# Altium PCB NODE_Module.PcbDoc (part 3 of 3)
Units mil, origin at the board's own origin, x right, y up, seen from the top; angles counter-clockwise.
Board outline 4300 x 3800 mil, 4 copper layers (Top Layer, Int1 (GND), Int2 (GND), Bottom Layer), stack 43.712 mil thick; 95 components, 106 nets, 420 pads, 98 vias.
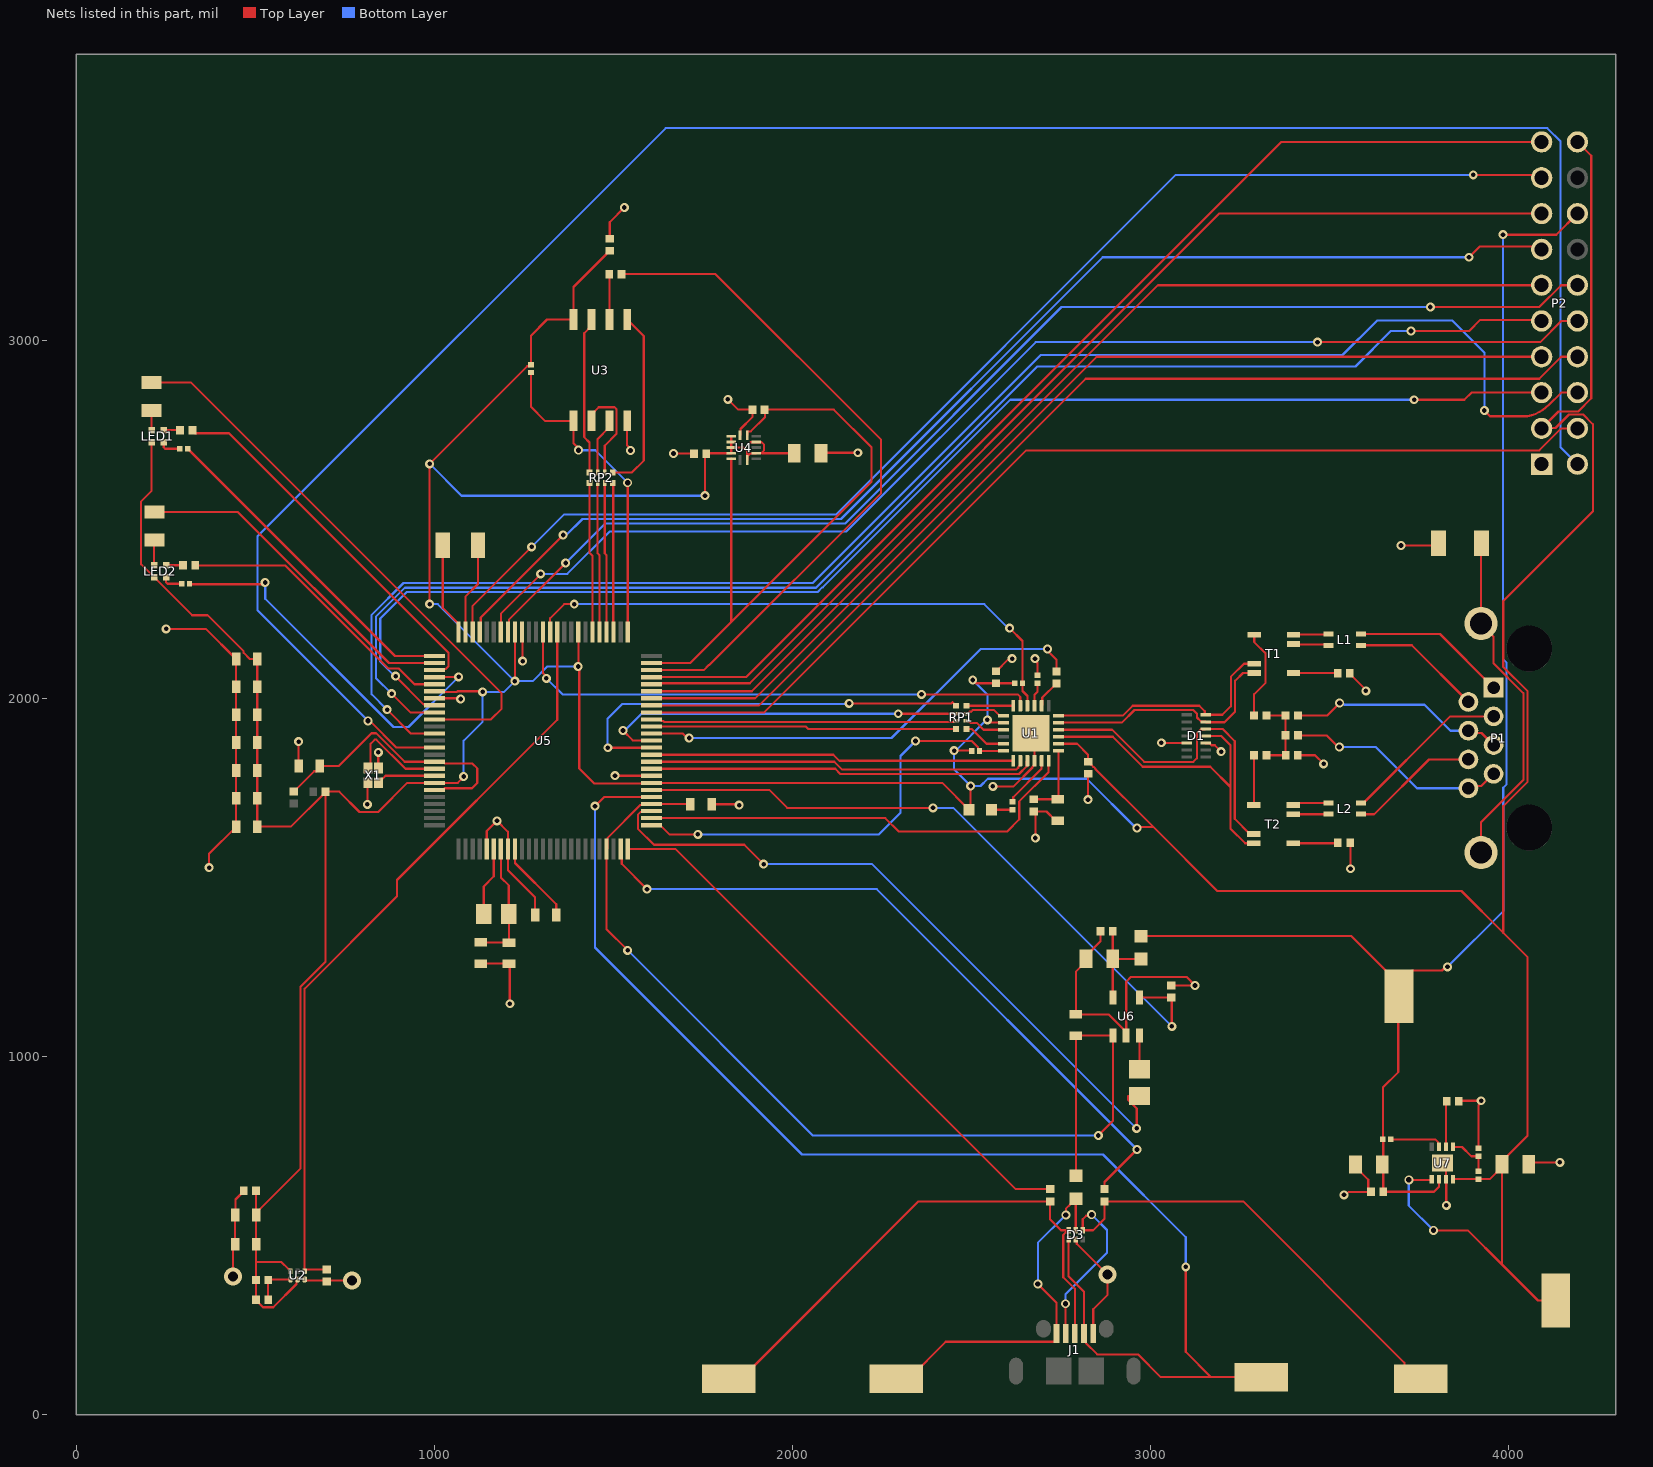
[diagram p4: the nets of this part, all layers, seen from the top]

## Via types
v1: diameter 25, hole 13, Top Layer to Bottom Layer, 83 vias
v2: diameter 25, hole 15, Top Layer to Bottom Layer, 12 vias
v3: diameter 50, hole 28, Top Layer to Bottom Layer, 3 vias

## Nets (pads, with @x,y where several pads share a name; then routed paths per layer and width w, separated by ;. In a path a pad name is that pad's centre, name@x,y a point inside that pad or via, vN(x,y) a via of type N, cw(c..) or ccw(c..) an arc to the next point about the centre after c; other vN are vias at no path point)
3V3: C1.2 C4.2 C9.2 C10.2 C11.2 C12.2 C13.2 C14.2 C17.2 C18.2 C19.1 C20.1 C21.1 C22.1 C23.1 C33.2 D2.1 FB1.1 FB2.1 FB3.2 LED1.1 LED2.1 P2.2 P2.20 R2.1 R3.2 R11.2 R19.2 TP6.1 U1.2 U1.14 U2.2 U2.6 U3.8 U4.2 U4.4 U4.8 U4.9 U4.10 U4.11 U4.14 U5.8 U5.17 U5.31 U5.44 U5.82 U7.1 U7.4 | length 16166.7
  Top Layer w6: LED1.1@210.54,2716.54 210.54,2580.4 181.31,2551.18 181.31,2375.6 LED2.1@217.54,2339.38 323.9,2233.01 366.97,2233.01 467.48,2132.5 467.48,2128.49 484.91,2111.06 C17.2@505.72,2111.06 C18.2@505.72,2033.17 C19.1@505.72,1955.29 C20.1@505.72,1877.4 C21.1@505.72,1799.52 C22.1@505.72,1721.64 C23.1@505.72,1642.64 599.57,1642.64 FB3.2@696.04,1739.1 ; C11.2@502,563.91 C9.2@502,625.99 ; U2.6@598.6,400.83 598.6,402.97 595.5,406.07 593.36,406.07 573.02,426.41 502.53,426.41 ; U2.2@618.28,378 615.21,374.93 615.21,365.03 550.37,300.19 521.62,300.19 501.99,319.82 FB2.1@501.99,321 FB1.1@501.99,376.29 502.53,376.82 502.53,426.41 ; v1(987,2264) v1(987,2656.06) 1259.48,2928.54 1265.52,2928.54 R11.2@1270,2933.02 1270,3014 1315,3059 U3.8@1389,3059 1389,3149.98 1481.19,3242.17 1481.19,3243.35 1488.82,3250.98 C12.2@1490,3250.98 ; U5.31@1000.85,2020.8 1002.65,2019 1062.83,2019 1064.62,2020.8 1133.2,2020.8 v1(1135,2019) ; v1(1082,1782.5) 1082,1781 1065.89,1764.89 U5.44@1000.85,1764.89 924.9,1764.89 843.51,1683.5 791.18,1683.5 734.4,1740.29 FB3.2@696.04,1740.29 FB3.2@696.04,1739.1 ; v1(1225,2049) 1225.26,2049.26 U5.17@1225.26,2186.15 ; U5.8@1402.43,2186.15 1402.43,2090.43 v1(1402,2090) 1405,2087 1405,1805 1447,1763 1605.26,1763 U5.82@1607.15,1764.89 2418.68,1764.89 D2.1@2493.57,1690 2498,1694.43 v1(2498,1756) ; v1(1756,2567) 1756,2680.84 C14.2@1759.54,2684.38 1760.92,2685.76 U4.11@1829.32,2685.76 U4.10@1829.32,2701.5 ; U4.8@1829.32,2733 U4.9@1829.32,2717.25 U4.10@1829.32,2701.5 ; U4.14@1874,2666.66 U4.14@1874,2676.11 ; 1884.02,2716.31 U4.4@1898.06,2716.31 ; U4.2@1899,2685.76 1898.06,2684.82 1882.71,2684.82 U4.14@1874,2676.11 ; U4.2@1899,2686.69 1914.24,2686.69 1921.39,2693.84 1921.39,2709.17 1914.24,2716.31 U4.4@1898.06,2716.31 ; U4.4@1899,2717.25 U4.4@1898.06,2716.31 ; 1916.11,2685.76 2004.76,2685.76 C13.2@2005.13,2685.38 ; v1(2452,1855) 2499.95,1855 R2.1@2500.95,1854 ; v1(2504,2052) 2513.01,2042.99 C1.2@2569,2042.99 R3.2@2621,2043 ; v1(2545,1941) 2552.99,1933.01 U1.14@2589.93,1933.01 ; U1.2@2743.47,1873.96 2795.68,1873.96 2826,1843.64 C4.2@2826,1824.01 2827.18,1824.01 2834.81,1816.38 2834.81,1815.2 2840.39,1809.62 2841.54,1809.62 2846.81,1804.35 2846.81,1803.2 3008,1642 ; v1(2963,1639) 2966,1642 3008,1642 ; v2(3722,656) 3784.47,656 U7.1@3786.47,658 ; v2(3791,515) 3887.04,515 3982.47,419.57 ; U7.4@3845.53,658 R19.2@3916.47,658 3947.94,658 3982.07,692.13 C33.2@3982.07,700 3982.07,707.87 4054,779.8 4054,1278 3985.67,1346.33 ; C33.2@3982.47,692.13 3982.47,419.57 ; P2.2@4093,2755 P2.2@4093.95,2755.95 ; TP6.1@4132,319 4083.04,319 3982.47,419.57 ; P2.20@4193,3555 4231.69,3516.31 4231.69,2838.98 4194.8,2802.09 4140.09,2802.09 P2.2@4093.95,2755.95 ; 502.53,426.41 C10.2@502.53,476 C11.2@502.53,558 502.53,563.91 625.97,687.34 625.97,1194.94 696.04,1265.01 FB3.2@696.04,1739.1 ; U4.10@1829.32,2701.5 1863.83,2701.5 1874,2691.33 U4.14@1874,2676.11 ; 3008,1642 3186.97,1463.03 3868.97,1463.03 3985.67,1346.33 ; 3985.67,1346.33 3985.67,1699.7 4054,1768.03 4054,2020.41 3985.67,2088.74 3985.67,2272.67 4236,2523 4236,2766.71 4209.02,2793.69 4169.42,2793.69 4131.69,2755.95 P2.2@4093.95,2755.95
  Bottom Layer w6: v1(987,2264) 1010,2264 v1(1225,2049) ; v1(987,2656.06) 1076.06,2567 v1(1756,2567) ; v1(1082,1782.5) 1082,1882.8 1135,1935.8 v1(1135,2019) 1195,2019 v1(1225,2049) ; v1(1402,2090) 1315.59,2090 1274.59,2049 v1(1225,2049) ; v1(2504,2052) 2545,2011 v1(2545,1941) 2542.5,1941 2456.5,1855 v1(2452,1855) 2452,1802 v1(2498,1756) 2525.77,1756 2546.27,1776.5 2822.5,1776.5 2960,1639 v1(2963,1639) ; v2(3722,656) 3722,584 v2(3791,515)
5V: C31.2 C32.2 FB5.1 P2.18 R20.1 TP5.1 U7.2 | length 4068.9
  Top Layer w6: FB5.1@2974,1337.05 3561.27,1337.05 3692.43,1205.89 TP5.1@3692.43,1201.8 ; C32.2@3647.87,699.07 3650.48,696.46 C31.2@3650.48,623.48 ; C32.2@3648.37,699.57 3650.47,701.67 R20.1@3650.47,767.95 ; C31.2@3650.48,622.48 C31.2@3650.48,623.48 ; TP5.1@3692.43,1169 3692.43,957.04 3649.43,914.04 R20.1@3649.43,769 ; TP5.1@3694.47,1169 3694.47,1199.75 TP5.1@3692.43,1201.8 ; U7.2@3806.16,658 3806.16,637 3792.14,622.98 3650.98,622.98 C31.2@3650.48,623.48 ; v1(3830,1251) 3824.86,1251 3814.66,1240.8 3731.43,1240.8 3694.47,1203.84 TP5.1@3692.43,1201.8 ; v1(3985,3296) 4134,3296 P2.18@4193,3355 ; R20.1@3649.43,769 R20.1@3650.47,767.95 ; R20.1@3649.43,769 R20.1@3650.47,767.95
  Bottom Layer w6: v1(3830,1251) 3985.67,1406.67 3985.67,1751.34 3995.17,1760.83 3995.17,2100.35 3985,2110.52 v1(3985,3296)
EFM_BUS: C15.2 C30.2 FB4.2 U5.72 U5.79 U6.1 | length 2930.7
  Top Layer w6: v1(1540,1297) 1481.17,1355.83 U5.72@1481.17,1579.85 1484.07,1582.76 1484.07,1611.23 1575.77,1702.93 1604.24,1702.93 U5.79@1607.15,1705.83 1714.64,1705.83 C15.2@1715.47,1705 ; FB4.2@2792.39,667.49 2792.39,1058.61 C30.2@2792,1059 2895.15,1059 U6.1@2895.29,1059.14 2895.29,820.29 v1(2855,780)
  Bottom Layer w6: v1(1540,1297) 2057,780 v1(2855,780)
GND: C1.1 C2.1 C3.1 C4.1 C5.1 C6.1 C7.1 C8.1 C9.1 C10.1 C11.1 C12.1 C13.1 C14.1 C15.1 C16.1 C17.1 C18.1 C19.2 C20.2 C21.2 C22.2 C23.2 C24.1 C25.2 C26.2 C28.2 C29.1 C30.1 C31.1 C32.1 C33.1 C34.1 D1.5 D1.10 D3.2 J1.5 P2.1 R4.1 R10.1 R13.1 R17.2 R21.1 U1.22 U1.25 U2.3 U3.4 U4.7 U5.16 U5.32 U5.55 U5.58 U5.83 U6.2 U7.3 U7.9 X1.2 X1.4 | length 5619
  Top Layer w6: v1(251,2195) 361.89,2195 446.25,2110.64 C17.1@446.67,2111.06 C18.1@446.67,2033.17 C19.2@446.67,1955.29 C20.2@446.67,1877.4 C21.2@446.67,1799.52 C22.2@446.67,1721.64 C23.2@446.67,1642.64 371,1566.97 v1(371,1528) ; v3(438,386) 438,470.53 C10.1@443.47,476 C11.1@443.47,558 445,559.53 445,601 460.35,616.35 460.35,618.36 C9.1@467.98,625.99 ; C24.1@620.94,1812 620,1812.94 621,1813.94 v1(621,1880) ; U2.3@637.97,378 641.03,374.94 696.94,374.94 697,375 v3(770,375) ; v1(813,1705) 813,1763.53 X1.2@814.47,1765 ; v1(843.7,1849.95) 843.7,1806.63 X1.4@844,1806.34 ; U5.32@1000.85,2001.11 U5.32@1000.85,2001.11 1071.77,2001.06 v1(1073.53,1999.3) ; C26.2@1129.81,1260.11 C25.2@1208.17,1260.11 ; U5.55@1146.52,1579.85 1146.52,1630.52 v1(1175,1659) 1205.57,1628.43 U5.58@1205.57,1579.85 1205.57,1521.42 1281.47,1445.52 C16.1@1281.47,1396 ; C25.2@1208.69,1259.58 C25.2@1208.17,1260.11 ; v1(1211,1148) 1211,1257.27 C25.2@1208.17,1260.11 ; U5.16@1244.94,2186.15 1245.97,2185.12 1245.97,2106.03 v1(1247,2105) ; C12.1@1490,3285 1490,3331 v1(1531,3372) ; v1(1505,1785) 1505.21,1784.79 1606.94,1784.79 U5.83@1607.15,1784.57 ; U3.4@1539,2776 1538,2775 1538,2708.55 1548.2,2698.34 v1(1548.2,2693.2) ; v1(1668,2685) 1724.91,2685 C14.1@1725.53,2684.38 ; C15.1@1774.53,1705 1849,1705 v1(1851.5,1702.5) ; v1(1820,2836) 1848.62,2807.38 R13.1@1888.41,2807.38 1888.41,2786.57 1855.25,2753.41 1855.25,2737.28 U4.7@1854.31,2736.35 ; C13.1@2079.93,2685.38 2081.55,2687 v1(2183,2687) ; v1(2560,1755) 2618.19,1755 2670.98,1807.79 2670.98,1810.32 2676.55,1815.89 U1.22@2676.55,1826.71 2676.55,1893.64 U1.25@2666.7,1903.49 ; C1.1@2569,2077.01 2570.18,2077.01 2601.54,2108.36 2610.36,2108.36 v1(2614,2112) ; v1(2678,2112) 2678,2106.86 2685,2099.86 R4.1@2685,2065.02 ; v1(2679,1611) 2679,1680.99 C3.1@2675,1684.99 2710.16,1684.99 2735.68,1659.47 C2.1@2741.58,1659.47 ; D3.2@2791.59,489.39 2794.59,486.39 2794.59,477.41 v3(2880,392) 2880,334 2840.46,294.46 J1.5@2840.46,227.24 ; v1(2826,1718) C4.1@2826,1789.99 ; C29.1@2860.99,1350 2860.99,1322.08 2820.2,1281.29 C28.2@2820.2,1273.42 2820.2,1265.54 2792,1237.34 C30.1@2792,1118.06 2883.72,1118.06 U6.2@2932.69,1069.09 ; U6.2@2932.69,1059.14 U6.2@2932.69,1069.09 ; v1(3031,1877) 3031.34,1876.66 3101.28,1876.66 D1.5@3101.62,1876.32 ; R17.2@3058,1199.13 3058.13,1199 v1(3125,1199) 3101,1223 2946,1223 2932.69,1209.69 U6.2@2932.69,1069.09 ; D1.10@3154.38,1876.32 3155.71,1874.98 3165.94,1874.98 3170.97,1869.96 3180.04,1869.96 v1(3198,1852) ; C8.1@3412.01,1842 3460,1842 v1(3484,1818) ; v1(3541,614) 3546.14,614 3554.63,622.48 C31.1@3616.46,622.48 3616.46,623.48 3608.83,631.11 3608.83,656.43 3573.07,692.19 C32.1@3573.07,699.07 ; C6.1@3557.01,2071 3557.01,2069.82 3602,2024.83 v1(3602,2022) ; C5.1@3558.02,1598 3559,1597.02 v1(3559,1525) ; v1(3700,2428) 3798.84,2428 C7.1@3804.84,2434 ; U7.9@3816,703 3825.84,693.16 U7.3@3825.84,658 3826.42,657.42 3826.42,585.58 v1(3827,585) ; C34.1@3861.48,876 3862.48,877 v1(3924,877) 3924,871.86 3916.47,864.33 R21.1@3916.47,744.02 ; C33.1@4056.87,700 4061.87,705 v1(4144,705)
HFXTAL_N: U5.43 X1.3 | length 166.1
  Top Layer w6: X1.3@844,1765 844,1766.97 853.8,1776.76 855.76,1776.76 863.57,1784.57 U5.43@1000.85,1784.57
HFXTAL_P: U5.42 X1.1 | length 288.5
  Top Layer w6: X1.1@814.47,1806.34 822.2,1814.07 822.2,1874.61 833.34,1885.75 838.31,1885.75 919.8,1804.26 U5.42@1000.85,1804.26
LFXTAL_N: U5.25 X2.1 | length 261.1
  Top Layer w6: X2.1@1023.79,2429 1023.79,2253.76 1067.78,2209.77 U5.25@1067.78,2186.15
LFXTAL_P: U5.24 X2.2 | length 257.2
  Top Layer w6: U5.24@1087.46,2186.15 1087.46,2285.8 1122.21,2320.54 X2.2@1122.21,2429
NetC2_2: C2.2 C3.2 U1.1 | length 203.3
  Top Layer w6: C3.2@2675,1719.01 2741.1,1719.01 C2.2@2741.58,1718.53 2743.47,1720.42 U1.1@2743.47,1854.27
NetC5_2: C5.2 T2.6 | length 125.8
  Top Layer w6: T2.6@3399,1596.19 3522.19,1596.19 C5.2@3524,1598
NetC6_2: C6.2 T1.6 | length 123.4
  Top Layer w6: T1.6@3400,2071.9 3522.09,2071.9 C6.2@3522.99,2071
NetC7_2: C7.2 P1.S1 P1.S2 | length 965.3
  Top Layer w6: P1.S2@3923.61,1570 3923.61,1654.61 4042,1773 4042,2015.44 3959,2098.44 3959,2172.23 P1.S1@3923.61,2207.62 ; P1.S1@3923.61,2210.16 P1.S1@3923.61,2207.62 ; C7.2@3925.16,2434 3923.61,2432.45 P1.S1@3923.61,2207.62
NetC8_2: C8.2 R5.1 R6.1 R7.1 R8.1 | length 218.7
  Top Layer w6: R5.1@3324,1842 C8.2@3377.99,1842 R8.1@3378,1897.29 R7.1@3378,1953 R6.1@3324.25,1953
NetC16_2: C16.2 U5.59 | length 231.6
  Top Layer w6: U5.59@1225.26,1579.85 1225.26,1541.11 1340.53,1425.84 C16.2@1340.53,1396
NetC24_2: C24.2 R14.1 U5.41 U5.45 | length 791.4
  Top Layer w6: R14.1@608,1741.13 608.79,1741.13 664.94,1797.28 671.19,1797.28 680,1806.09 C24.2@680,1812 733.11,1812 824.61,1903.5 837.53,1903.5 917.08,1823.94 1024.47,1823.94 1029.25,1819.17 1106.32,1819.17 1120,1805.49 1120,1764.51 1105.47,1749.98 1029.25,1749.98 1024.47,1745.2 U5.45@1000.85,1745.2
NetC25_1: C25.1 C26.1 L3.2 U5.57 | length 349.8
  Top Layer w6: C26.1@1129.81,1319.16 1130.34,1318.64 C25.1@1208.69,1318.64 1208.69,1397.15 L3.2@1207.84,1398 1207.84,1478.61 1185.89,1500.57 U5.57@1185.89,1579.85
NetC28_1: C28.1 C29.2 FB5.2 U6.5 | length 263.7
  Top Layer w6: C29.2@2895.01,1350 C28.1@2895,1273.42 ; U6.5@2895.29,1165.66 2895,1165.94 C28.1@2895,1273.42 ; FB5.2@2974,1272.95 2973.54,1273.42 C28.1@2895,1273.42
NetC34_2: C34.2 U7.6 | length 128.7
  Top Layer w6: U7.6@3825.84,748 3825.84,874.38 C34.2@3827.46,876
NetD1_11: D1.11 T2.1 U1.3 | length 934
  Top Layer w6: U1.3@2743.47,1893.64 2895.36,1893.64 2979,1810 3167.5,1810 3224,1753.5 ; D1.11@3154.38,1896 3198,1896 3224,1870 3224,1753.5 ; T2.1@3289.12,1596.19 3264.81,1596.19 3224,1637 3224,1753.5
NetD1_12: D1.12 T2.2 U1.4 | length 910.4
  Top Layer w6: U1.4@2743.47,1913.33 2893.23,1913.33 2982.95,1823.61 3119.76,1823.61 3130,1833.85 3130,1903.09 3141.26,1914.35 3153.05,1914.35 D1.12@3154.38,1915.68 3201.77,1915.68 3236,1881.46 3236,1664.39 3278.62,1621.78 T2.2@3289.12,1621.78
NetD1_13: D1.13 T1.1 U1.5 | length 689
  Top Layer w6: U1.5@2743.47,1933.01 2920.41,1933.01 2955.78,1968.39 3119.76,1968.39 3130.51,1957.64 3130.51,1947.45 3141.26,1936.7 3153.05,1936.7 D1.13@3154.38,1935.37 3155.71,1934.04 3207.01,1934.04 3237,1964.03 3237,2050 3258.9,2071.9 T1.1@3290.12,2071.9
NetD1_14: D1.14 T1.2 U1.6 | length 677.8
  Top Layer w6: U1.6@2743.47,1952.7 2923.12,1952.7 2950.81,1980.39 3136.61,1980.39 3152.13,1964.87 D1.14@3152.13,1956.39 ; D1.14@3154.38,1955.06 3163.02,1955.06 3201.06,1955.06 3225,1979 3225,2060.97 3261.52,2097.49 T1.2@3290.12,2097.49
NetD2_2: D2.2 R9.2 | length 58.4
  Top Layer w6: D2.2@2556.56,1690 R9.2@2615,1690
NetD3_1: D3.1 J1.4 TP1.1 U5.80 | length 3809.9
  Top Layer w6: v1(1449,1700) 1474.52,1725.52 U5.80@1607.15,1725.52 ; D3.1@2771.89,489.39 2771.89,386.05 2814.87,343.08 2814.87,208.74 2819.87,203.74 2819.87,200.6 2851.96,168.5 2965.45,168.5 3028.95,105 3169.48,105 ; v1@3100.74,411.26 v1(3099,413) 3099,175.48 3169.48,105 ; TP1.1@3310,105 3169.48,105
  Bottom Layer w6: v1(1449,1700) 1449,1305 2027,727 2868,727 3099,496 v1(3099,413)
NetD3_4: D3.4 J1.2 R16.1 TP3.1 | length 1674.8
  Top Layer w6: v2(2763,310) 2763.34,309.66 2763.34,227.58 J1.2@2763.68,227.24 ; v2(2836,559) 2832.8,555.8 2820.8,555.8 2811.29,546.29 D3.4@2811.29,515.39 2840.39,515.39 2872,547 R16.1@2872,595.87 3259.13,595.87 3709.55,145.45 3709.55,136.96 3746.51,100 TP3.1@3755,100
  Bottom Layer w6: v2(2763,310) 2763,336.5 2879,452.5 2879,516 v2(2836,559)
NetD3_5: D3.5 FB4.1 J1.1 TP4.1 | length 1042.2
  Top Layer w6: TP4.1@2290,100 2324.84,100 2428.58,203.74 2733.09,203.74 2738.09,208.74 2738.09,312.91 v2(2686,365) ; v2(2764,558) 2764,575 2777.08,588.08 2777.08,588.87 2791.6,603.39 FB4.1@2792.39,603.39 2791.61,602.61 D3.5@2791.61,515.39
  Bottom Layer w6: v2(2686,365) 2686,480 v2(2764,558)
NetD3_6: D3.6 J1.3 R15.1 TP2.1 | length 1528.5
  Top Layer w6: TP2.1@1822,100 1856.84,100 2352.72,595.87 R15.1@2720,595.87 2720,546 2750.61,515.39 D3.6@2771.92,515.39 2771.92,512.39 2768.92,509.39 2764.17,509.39 2756.89,502.12 2756.89,384.08 2789.28,351.7 J1.3@2789.28,227.24
NetFB1_2: FB1.2 FB2.2 U2.1 | length 108.7
  Top Layer w6: FB2.2@536.01,321 FB1.2@536.01,366.08 ; FB1.2@536.01,376.08 FB1.2@536.01,376.29 537.92,378.2 598.4,378.2 U2.1@598.6,378
NetL1_1: L1.1 T1.4 | length 98.4
  Top Layer w6: T1.4@3400,2178.59 3401.08,2179.67 3496.42,2179.67 L1.1@3497.5,2180.75
NetL1_2: L1.2 T1.5 | length 99.1
  Top Layer w6: T1.5@3400,2153 3401.87,2151.13 3495.63,2151.13 L1.2@3497.5,2149.25
NetL1_3: L1.3 P1.2 | length 365.7
  Top Layer w6: L1.3@3588.5,2149.25 3730.18,2149.25 P1.2@3888.57,1990.87
NetL1_4: L1.4 P1.1 | length 432.2
  Top Layer w6: L1.4@3588.5,2180.75 3808.92,2180.75 P1.1@3958.65,2031.02
NetL2_1: L2.1 T2.4 | length 100.9
  Top Layer w6: T2.4@3399,1702.88 3409.5,1702.88 3415.37,1708.75 L2.1@3497.5,1708.75
NetL2_2: L2.2 T2.5 | length 98.5
  Top Layer w6: T2.5@3399,1677.29 L2.2@3497.5,1677.25
NetL2_3: L2.3 P1.6 | length 363.4
  Top Layer w6: L2.3@3588.5,1677.25 3625.25,1677.25 3778.24,1830.24 P1.6@3888.57,1830.24
NetL2_4: L2.4 P1.3 | length 470.4
  Top Layer w6: L2.4@3588.5,1708.75 3595.5,1708.75 3837.46,1950.71 P1.3@3958.65,1950.71
NetL3_1: L3.1 U5.56 | length 193.5
  Top Layer w6: L3.1@1138.16,1398 1138.16,1475.57 1166.2,1503.61 U5.56@1166.2,1579.85
NetLED1_2: LED1.2 R24.2 | length 55
  Top Layer w6: R24.2@210.27,2804.9 210.54,2804.63 LED1.2@210.54,2750
NetLED1_3: LED1.3 R26.2 | length 46.3
  Top Layer w6: LED1.3@244,2750 289.87,2750 R26.2@290.14,2750.27
NetLED1_4: LED1.4 R22.2 | length 61
  Top Layer w6: LED1.4@244,2716.54 244.34,2716.19 244.34,2702.19 248.27,2698.27 R22.2@289.27,2698.27
NetLED2_2: LED2.2 R25.2 | length 70.6
  Top Layer w6: LED2.2@217.54,2372.84 217.54,2442.74 R25.2@218.27,2442.74
NetLED2_3: LED2.3 R27.2 | length 47.4
  Top Layer w6: LED2.3@251,2372.84 297.41,2372.84 R27.2@298.14,2372.11
NetLED2_4: LED2.4 R23.2 | length 59.5
  Top Layer w6: LED2.4@251,2339.38 251,2324.62 254.51,2321.11 R23.2@294.24,2321.11
NetP1_4: P1.4 P1.5 R7.2 | length 609.6
  Top Layer w6: R7.2@3412.25,1953 3494,1953 v2(3529,1988) ; P1.4@3888.57,1910.55 3895.17,1903.95 3925.09,1903.95 P1.5@3958.65,1870.39
  Bottom Layer w6: v2(3529,1988) 3532.64,1984.36 3540.65,1984.36 3542.01,1983 3766,1983 3838.45,1910.55 P1.4@3888.57,1910.55
NetP1_7: P1.7 P1.8 R8.2 | length 624.1
  Top Layer w6: R8.2@3412.25,1897.29 3492.71,1897.29 3525,1865 v2(3528,1865) ; P1.8@3888.57,1749.92 3895.17,1756.52 3925.09,1756.52 P1.7@3958.65,1790.08
  Bottom Layer w6: v2(3528,1865) 3630,1865 3745.08,1749.92 P1.8@3888.57,1749.92
NetP2_3: P2.3 U5.33 | length 3828.7
  Top Layer w6: v1(892,2063) 892,2061.8 969.47,1984.33 997.94,1984.33 U5.33@1000.85,1981.43 ; v1(3737,2835) 3877,2835 3897,2855 P2.3@4093,2855
  Bottom Layer w6: v1(892,2063) 890,2063 849,2104 849,2224.06 922.94,2298 2070.97,2298 2083.97,2311 2085,2311 2609,2835 v1(3737,2835)
NetP2_4: P2.4 U5.94 | length 2881
  Top Layer w6: U5.94@1607.15,2001.11 1896.11,2001.11 2850,2955 P2.4@4093,2955
NetP2_5: P2.5 U5.34 | length 3975.4
  Top Layer w6: v1(881,2014) 933.26,1961.74 U5.34@1000.85,1961.74 ; v1(3728,3027) 3891,3027 3922,3058 4090,3058 P2.5@4093,3055
  Bottom Layer w6: v1(881,2014) 837,2058 837,2229.03 917.97,2310 2066,2310 2684,2928 3573,2928 3672,3027 v1(3728,3027)
NetP2_6: P2.6 U5.95 | length 2955.7
  Top Layer w6: U5.95@1607.15,2020.8 1886.8,2020.8 3021,3155 P2.6@4093,3155
NetP2_7: P2.7 U5.22 | length 3437.6
  Top Layer w6: U5.22@1126.83,2186.15 1129.74,2189.06 1129.74,2226.74 v1(1360,2457) ; v1(3890,3233) 3920,3263 4085,3263 P2.7@4093,3255
  Bottom Layer w6: v1(1360,2457) 1369,2457 1414,2502 2136,2502 2867,3233 v1(3890,3233)
NetP2_8: P2.8 U5.96 | length 3030.3
  Top Layer w6: U5.96@1607.15,2040.48 1609.67,2043 1881,2043 3193,3355 P2.8@4093,3355
NetP2_9: P2.9 U5.23 | length 3560.8
  Top Layer w6: U5.23@1107.15,2186.15 1107.15,2259.15 v1(1272,2424) ; v1(3902,3463) 4085,3463 P2.9@4093,3455
  Bottom Layer w6: v1(1272,2424) 1362,2514 2122,2514 3071,3463 v1(3902,3463)
NetP2_10: P2.10 U5.97 | length 3105
  Top Layer w6: U5.97@1607.15,2060.17 1870.46,2060.17 3365.3,3555 P2.10@4093,3555
NetP2_11: P2.11 U5.39 | length 5908.8
  Top Layer w6: v2(815,1938) 820,1938 894.68,1863.32 U5.39@1000.85,1863.32
  Bottom Layer w6: v2(815,1938) 506.2,2246.8 506.2,2453.61 1646.28,3593.69 4109.02,3593.69 4145.91,3556.8 4145.91,2702.09 P2.11@4193,2655
NetP2_12: P2.12 U5.92 | length 2914.4
  Top Layer w6: U5.92@1607.15,1961.74 1921.74,1961.74 2653.69,2693.69 4086.39,2693.69 4147.71,2755 P2.12@4193,2755
NetP2_13: P2.13 U5.37 | length 4380.4
  Top Layer w6: v1(868.2,1969.2) 868.2,1968.8 934.32,1902.68 U5.37@1000.85,1902.68 ; v1(3933,2805) 3949,2789 4052.99,2789 4053.57,2789 ccw(c4031.76,2902.5) 4113.51,2820.8 4147.71,2855 P2.13@4193,2855
  Bottom Layer w6: v1(868.2,1969.2) 867.8,1969.2 825,2012 825,2234 914,2323 2057,2323 2694,2960 3537,2960 3633,3056 3844,3056 3933,2967 v1(3933,2805)
NetP2_14: P2.14 U5.93 | length 2989.1
  Top Layer w6: U5.93@1607.15,1981.43 1907.43,1981.43 2819.69,2893.69 4086.39,2893.69 4147.71,2955 P2.14@4193,2955
NetP2_15: P2.15 U5.19 | length 3397.1
  Top Layer w6: U5.19@1185.89,2186.15 1185.89,2236.89 1297,2348 v1(1297,2348.62) ; v1(3467,2996) 4088.71,2996 4147.71,3055 P2.15@4193,3055
  Bottom Layer w6: v1(1297,2348.62) 1371.62,2348.62 1490,2467 2151,2467 2680,2996 v1(3467,2996)
NetP2_16: P2.16 U5.18 | length 3407.1
  Top Layer w6: U5.18@1205.57,2186.15 1208.48,2189.06 1208.48,2220.48 v1(1367,2379) ; v1(3782,3094) 4086.71,3094 4147.71,3155 P2.16@4193,3155
  Bottom Layer w6: v1(1367,2379) 1477,2489 2147,2489 2752,3094 v1(3782,3094)
NetR1_1: R1.1 U5.89 | length 1287.3
  Top Layer w6: U5.89@1607.15,1902.68 1694.28,1902.68 1706.96,1890 v1(1712,1890) ; v1(2713,2139) 2713,2133.86 2738,2108.86 R1.1@2738,2076.25
  Bottom Layer w6: v1(1712,1890) 2277,1890 2526,2139 v1(2713,2139)
NetR1_2: R1.2 U1.8 | length 79.5
  Top Layer w6: U1.8@2696.23,1980.26 2698.35,1982.38 2698.35,2003.14 2737.21,2042 R1.2@2738,2042
NetR2_2: R2.2 U1.18 U5.76 | length 1210
  Top Layer w6: U5.76@1607.15,1646.78 1630.77,1646.78 1656.55,1621 v1(1736,1621) ; v2(2344,1882) 2501.03,1882 2518.52,1864.52 2518.52,1858.48 R2.2@2523,1854 2523.14,1854.14 2589.79,1854.14 U1.18@2589.93,1854.27
  Bottom Layer w6: v1(1736,1621) 2242,1621 2302,1681 2302,1840 v2(2344,1882)
NetR3_1: R3.1 U1.10 U5.12 | length 1603.3
  Top Layer w6: U5.12@1323.69,2186.15 1323.69,2224.68 1363.01,2264 v1(1391,2264) ; v1(2607,2197) 2643.05,2160.95 R3.1@2643.05,2043 2643.05,2021.51 2656.86,2007.7 U1.10@2656.86,1980.26
  Bottom Layer w6: v1(1391,2264) 2536,2264 2603,2197 v1(2607,2197)
NetR4_2: R4.2 U1.9 | length 66.2
  Top Layer w6: U1.9@2676.55,1980.26 2676.55,2010.56 2685,2019.02 R4.2@2685,2042.98
NetR5_2: R5.2 T2.3 | length 139.4
  Top Layer w6: T2.3@3289.12,1702.88 3289.75,1703.51 R5.2@3289.75,1842
NetR6_2: R6.2 T1.3 | length 252.1
  Top Layer w6: R6.2@3290,1953 3290,2012.41 3322,2044.41 3322,2126.1 3290.12,2157.99 T1.3@3290.12,2178.59
NetR9_1: R9.1 U1.23 | length 148.3
  Top Layer w6: R9.1@2615,1712.05 2617.01,1714.06 2617.01,1725.01 2696.23,1804.23 U1.23@2696.23,1826.71
NetR10_2: R10.2 U2.4 U5.11 | length 2140.8
  Top Layer w6: U2.4@637.97,400.83 U2.4@637.97,402.97 ; R10.2@700,406.13 641.12,406.13 U2.4@637.97,402.97 ; U5.11@1343.37,2186.15 1343.37,1941.14 896,1493.77 896,1448 637.97,1189.97 U2.4@637.97,402.97
NetR11_1: R11.1 U3.1 U5.1 | length 910.8
  Top Layer w6: R11.1@1270,2910.98 1270,2815 1309,2776 U3.1@1389,2776 1389,2713.14 1403,2699.14 v2(1403,2694) ; U5.1@1540.22,2186.15 v2(1540.22,2603.22)
  Bottom Layer w6: v2(1403,2694) 1449.44,2694 v2(1540.22,2603.22)
NetR12_1: R12.1 U3.6 | length 127.1
  Top Layer w6: R12.1@1488.87,3186 1489,3185.87 U3.6@1489,3059
NetR12_2: R12.2 U5.98 | length 1911.2
  Top Layer w6: R12.2@1523.13,3186 1785,3186 2248,2723 2248,2574 1768,2094 1767,2094 1752.85,2079.85 U5.98@1607.15,2079.85
NetR13_2: R13.2 U4.6 U4.12 U5.99 | length 1814.1
  Top Layer w6: U5.99@1607.15,2099.54 1714.54,2099.54 1830,2215 ; U4.12@1829.32,2670.01 1829.32,2215.68 1830,2215 ; U4.6@1874,2736.35 1874,2745.8 1874.94,2746.73 1883.82,2746.73 1923.66,2786.57 1923.66,2806.38 R13.2@1922.66,2807.38 2115.62,2807.38 2221,2702 2221,2606 1830,2215
NetR15_2: R15.2 U5.75 | length 1573.2
  Top Layer w6: U5.75@1540.22,1579.85 1674.15,1579.85 2623.87,630.13 R15.2@2720,630.13
NetR16_2: R16.2 U5.74 | length 1961
  Top Layer w6: U5.74@1520.54,1579.85 1523.44,1576.94 1523.44,1538.56 v1(1594,1468) ; R16.2@2872,630.13 2872,650 v1(2963,741)
  Bottom Layer w6: v1(1594,1468) 2236,1468 v1(2963,741)
NetR17_1: R17.1 U5.81 U6.4 | length 1895.3
  Top Layer w6: U5.81@1607.15,1745.2 1935.8,1745.2 1986,1695 v1(2393,1695) ; U6.4@2970.09,1165.66 2970.75,1165 3057.87,1165 R17.1@3058,1164.87 3060,1162.87 v1(3060,1085)
  Bottom Layer w6: v1(2393,1695) 2450,1695 v1(3060,1085)
NetR18_1: R18.1 U6.3 | length 94.2
  Top Layer w6: R18.1@2970,965 2970,1059.05 U6.3@2970.09,1059.14
NetR18_2: R18.2 U5.78 | length 1954.7
  Top Layer w6: U5.78@1607.15,1686.15 1604.24,1683.24 1575.77,1683.24 1568.62,1676.1 1568.62,1650.34 1568.62,1637.15 1613.92,1591.85 1866.15,1591.85 v1(1920,1538) ; v1(2962,800) 2962,855.42 2937.47,879.95 2937.47,890.2 R18.2@2970,890.2
  Bottom Layer w6: v1(1920,1538) 2223,1538 2961,800 v1(2962,800)
NetR19_1: R19.1 R21.2 U7.5 | length 123.7
  Top Layer w6: U7.5@3845.53,748 3870.68,748 3896.71,721.98 R21.2@3916.47,721.98 R19.1@3916.47,680.05
NetR20_2: R20.2 U7.7 | length 149.9
  Top Layer w6: R20.2@3671.47,769 3796.2,769 3803.16,762.04 3803.16,751 U7.7@3806.16,748
NetR22_1: R22.1 U5.26 | length 929.6
  Top Layer w6: R22.1@311.31,2698.27 311.31,2697.87 315.8,2693.39 316.19,2693.39 890.36,2119.22 U5.26@1000.85,2119.22
NetR23_1: R23.1 U5.29 | length 1073.8
  Top Layer w6: R23.1@316.29,2321.11 317.85,2319.55 519.45,2319.55 524.59,2324.7 v1(527.7,2324.7) ; U5.29@1000.85,2060.17 1067.17,2060.17 v1(1068,2061)
  Bottom Layer w6: v1(527.7,2324.7) 527.7,2279.3 886,1921 928,1921 v1(1068,2061)
NetR24_1: R24.1 U5.35 | length 1580.1
  Top Layer w6: R24.1@210.27,2883.64 319.36,2883.64 1188,2015 1188,1972 1158.06,1942.06 U5.35@1000.85,1942.06
NetR25_1: R25.1 U5.27 | length 957.4
  Top Layer w6: R25.1@218.27,2521.48 451.52,2521.48 873.46,2099.54 U5.27@1000.85,2099.54
NetR26_1: R26.1 U5.28 | length 1054.5
  Top Layer w6: R26.1@324.39,2750.27 324.39,2749.48 332.42,2741.46 426.78,2741.46 1039.38,2128.85 1039.38,2089.9 1032.23,2082.76 1003.76,2082.76 U5.28@1000.85,2079.85
NetR27_1: R27.1 U5.30 | length 805.8
  Top Layer w6: R27.1@332.39,2372.11 583.92,2372.11 871.53,2084.5 900.91,2084.5 944.93,2040.48 U5.30@1000.85,2040.48
NetRP1_1: RP1.1 U5.87 | length 1199.9
  Top Layer w6: v1(1485,1863) 1606.83,1863 U5.87@1607.15,1863.32 ; v1(2159,1987) 2444.65,1987 2447.65,1990 RP1.1@2457.17,1980.48
  Bottom Layer w6: v1(1485,1863) 1484,1864 1484,1944 1525,1985 2157,1985 v1(2159,1987)
NetRP1_2: RP1.2 U5.88 | length 1041.4
  Top Layer w6: v1(1527,1911) 1554.5,1883.5 1606.65,1883.5 U5.88@1607.15,1883 ; v1(2296,1958) 2296.16,1957.84 RP1.2@2457.17,1957.84
  Bottom Layer w6: v1(1527,1911) 1532,1911 1579,1958 v1(2296,1958)
NetRP1_3: RP1.3 U5.91 | length 854.2
  Top Layer w6: U5.91@1607.15,1942.06 1630.77,1942.06 1635.55,1937.28 1640.41,1937.28 1642.68,1935 2450.56,1935 2453.72,1938.16 RP1.3@2457.17,1938.16
NetRP1_4: RP1.4 U5.90 | length 852.9
  Top Layer w6: U5.90@1607.15,1922.37 2037.76,1922.37 2044.61,1915.52 RP1.4@2457.17,1915.52
NetRP1_5: RP1.5 U1.17 | length 120.3
  Top Layer w6: RP1.5@2486.83,1915.52 2501,1915.52 2542.56,1873.96 U1.17@2589.93,1873.96
NetRP1_6: RP1.6 U1.15 | length 113.4
  Top Layer w6: RP1.6@2486.83,1938.16 2488.95,1936.04 2494.45,1936.04 2497.9,1932.59 2514.87,1932.59 2534.13,1913.33 U1.15@2589.93,1913.33
NetRP1_7: RP1.7 U1.13 | length 113.6
  Top Layer w6: RP1.7@2486.83,1957.84 2490.28,1957.84 2495.85,1963.41 2499.13,1963.41 2503.72,1968 2563.8,1968 2579.1,1952.7 U1.13@2589.93,1952.7
NetRP1_8: RP1.8 U1.12 | length 130.7
  Top Layer w6: RP1.8@2486.83,1980.48 2617.27,1980.48 U1.12@2617.49,1980.26
NetRP2_1: RP2.1 U5.6 | length 419.5
  Top Layer w6: RP2.1@1433.68,2602.33 1433.68,2407.33 1441.8,2399.21 U5.6@1441.8,2186.15
NetRP2_2: RP2.2 U5.5 | length 418.3
  Top Layer w6: RP2.2@1456.32,2602.33 1456.32,2405.85 1461.48,2400.69 U5.5@1461.48,2186.15
NetRP2_3: RP2.3 U5.4 | length 418.3
  Top Layer w6: RP2.3@1476,2602.33 1476,2405.85 1481.17,2400.69 U5.4@1481.17,2186.15
NetRP2_4: RP2.4 U5.3 | length 417.1
  Top Layer w6: RP2.4@1498.64,2602.33 1499.74,2601.22 1499.74,2187.26 U5.3@1500.85,2186.15
NetRP2_5: RP2.5 U3.5 | length 513.1
  Top Layer w6: RP2.5@1498.64,2632 1552,2632 1585,2665 1585,3013 U3.5@1539,3059
NetRP2_6: RP2.6 U3.2 | length 288.9
  Top Layer w6: U3.2@1439,2776 1439,2794 1459,2814 1503.73,2814 1509,2808.73 1509,2739.65 1476,2706.65 RP2.6@1476,2632
NetRP2_7: RP2.7 U3.3 | length 157.5
  Top Layer w6: RP2.7@1456.32,2632 1456.32,2725.32 1489,2758 U3.3@1489,2776
NetRP2_8: RP2.8 U3.7 | length 441.4
  Top Layer w6: RP2.8@1433.68,2632 1433.68,2715.81 1419,2730.48 1419,3021 1439,3041 U3.7@1439,3059
NetU1_11: U1.11 U5.13 | length 1503.2
  Top Layer w6: U5.13@1304,2186.15 1304,2071.14 1313,2062.14 v1(1313,2057) ; v1(2361,2012) 2630,2012 2636.8,2005.2 2636.8,1980.64 U1.11@2637.18,1980.26
  Bottom Layer w6: v1(1313,2057) 1358,2012 v1(2361,2012)
NetU1_19: U1.19 U5.86 | length 1017.3
  Top Layer w6: U5.86@1607.15,1843.63 2114.61,1843.63 2131.53,1826.71 U1.19@2617.49,1826.71
NetU1_20: U1.20 U5.85 | length 1057.4
  Top Layer w6: U5.85@1607.15,1823.94 2117.09,1823.94 2139.27,1801.77 2625.59,1801.77 2631.61,1807.79 2631.61,1810.32 2637.18,1815.89 U1.20@2637.18,1826.71
NetU1_21: U1.21 U5.84 | length 1078.8
  Top Layer w6: U5.84@1607.15,1804.26 2119.81,1804.26 2134.3,1789.77 2633.27,1789.77 2654.74,1811.24 2654.74,1824.6 U1.21@2656.86,1826.71
NetU1_24: U1.24 U5.77 | length 1254.1
  Top Layer w6: U5.77@1607.15,1666.46 2259.54,1666.46 2297,1629 2600,1629 2634,1663 2634,1713.18 2715.92,1795.09 U1.24@2715.92,1826.71
pads on no net: D1.1 D1.2 D1.3 D1.4 D1.6 D1.7 D1.8 D1.9 D3.3 FB3.1 J1.6 J1.7 J1.8 J1.9 J1.10 J1.11 P1. P2.17 P2.19 R14.2 U1.7 U1.16 U2.5 U4.1 U4.3 U4.5 U4.13 U5.2 U5.7 U5.9 U5.10 U5.14 U5.15 U5.20 U5.21 U5.36 U5.38 U5.40 U5.46 U5.47 U5.48 U5.49 U5.50 U5.51 U5.52 U5.53 U5.54 U5.60 U5.61 U5.62 U5.63 U5.64 U5.65 U5.66 U5.67 U5.68 U5.69 U5.70 U5.71 U5.73 U5.100 U7.8

## Polygon pours and split planes (outlines as drawn)
GND on Int1 (GND) "GND_L02_P000" (solid, pour order 0): 0,3800 4300,3800 4300,0 0,0
GND on Int2 (GND) "GND_L03_P001" (solid, pour order 1): 0,3800 4300,3800 4300,0 0,0

## Keep-outs
Keep-Out Layer:
  lines w20: 4300,950 4300,0 0,0 0,3800 4300,3800 4300,2850 4300,950 ; 4300,950 4300,950

## Other copper
Top Layer:
  region: 2740.81,2354.74
  region: 2740.81,2354.74
  region: 2740.81,2354.74
  region: 2740.81,2354.74
  region: 2740.81,2354.74
  region: 2740.81,2354.74
  region: 2740.81,2354.74
  region: 2740.81,2354.74
  region: 2740.81,2354.74
  region: 2740.81,2354.74
  region: 2740.81,2354.74
  region: 2740.81,2354.74
  region: 2740.81,2354.74
  region: 2740.81,2354.74
  region: 2740.81,2354.74
  region: 2740.81,2354.74
  region: 2740.81,2354.74
  region: 2740.81,2354.74
  region: 2740.81,2354.74
  region: 2740.81,2354.74
  region: 2740.81,2354.74
  region: 2740.81,2354.74
  region: 2740.81,2354.74
  region: 2740.81,2354.74
  region: 2740.81,2354.74
  region: 2740.81,2354.74
  region: 2740.81,2354.74
  region: 2740.81,2354.74
  region: 2740.81,2354.74
  region: 2740.81,2354.74
  region: 2740.81,2354.74
  region: 2740.81,2354.74
  region: 2740.81,2354.74
  region: 2740.81,2354.74
  region: 2740.81,2354.74
  region: 2740.81,2354.74
  region: 2740.81,2354.74
  region: 2740.81,2354.74
  region: 2740.81,2354.74
  region: 2740.81,2354.74
  region: 2740.81,2354.74
  region: 2740.81,2354.74
  region: 2740.81,2354.74
  region: 2740.81,2354.74
  region: 2740.81,2354.74
  region: 2740.81,2354.74
  region: 2740.81,2354.74
  region: 2740.81,2354.74
  region: 2740.81,2354.74
  region: 2740.81,2354.74
  region: 2740.81,2354.74
  region: 2740.81,2354.74
  region: 2740.81,2354.74
  region: 2740.81,2354.74
  region: 2740.81,2354.74
  region: 2740.81,2354.74
  region: 2740.81,2354.74
  region: 2740.81,2354.74
  region: 2740.81,2354.74

## Text inside footprints (layer, text, board x,y; h text height)
U3: Top Overlay "*" at 1372,2753.5 h50 r90; Mechanical 13 "*" at 1413.5,2816.5 h50 r90
U5: Top Overlay "*" at 1515,2258.5 h50 r270; Mechanical 13 "*" at 1563,2198.5 h50 r270; Bottom Overlay "*" at 1515,2258.5 h50 r270
U6: Mechanical 13 "*" at 2923.6,1076.43 h50 r90